# Altium PCB AnalExtend.PcbDoc (part 1 of 3)
Units mm, origin at the board's own origin, x right, y up, seen from the top; angles counter-clockwise.
Board outline 190 x 160 mm, 2 copper layers (Top Layer, Bottom Layer), stack 1.536 mm thick; 277 components, 158 nets, 942 pads, 254 vias.
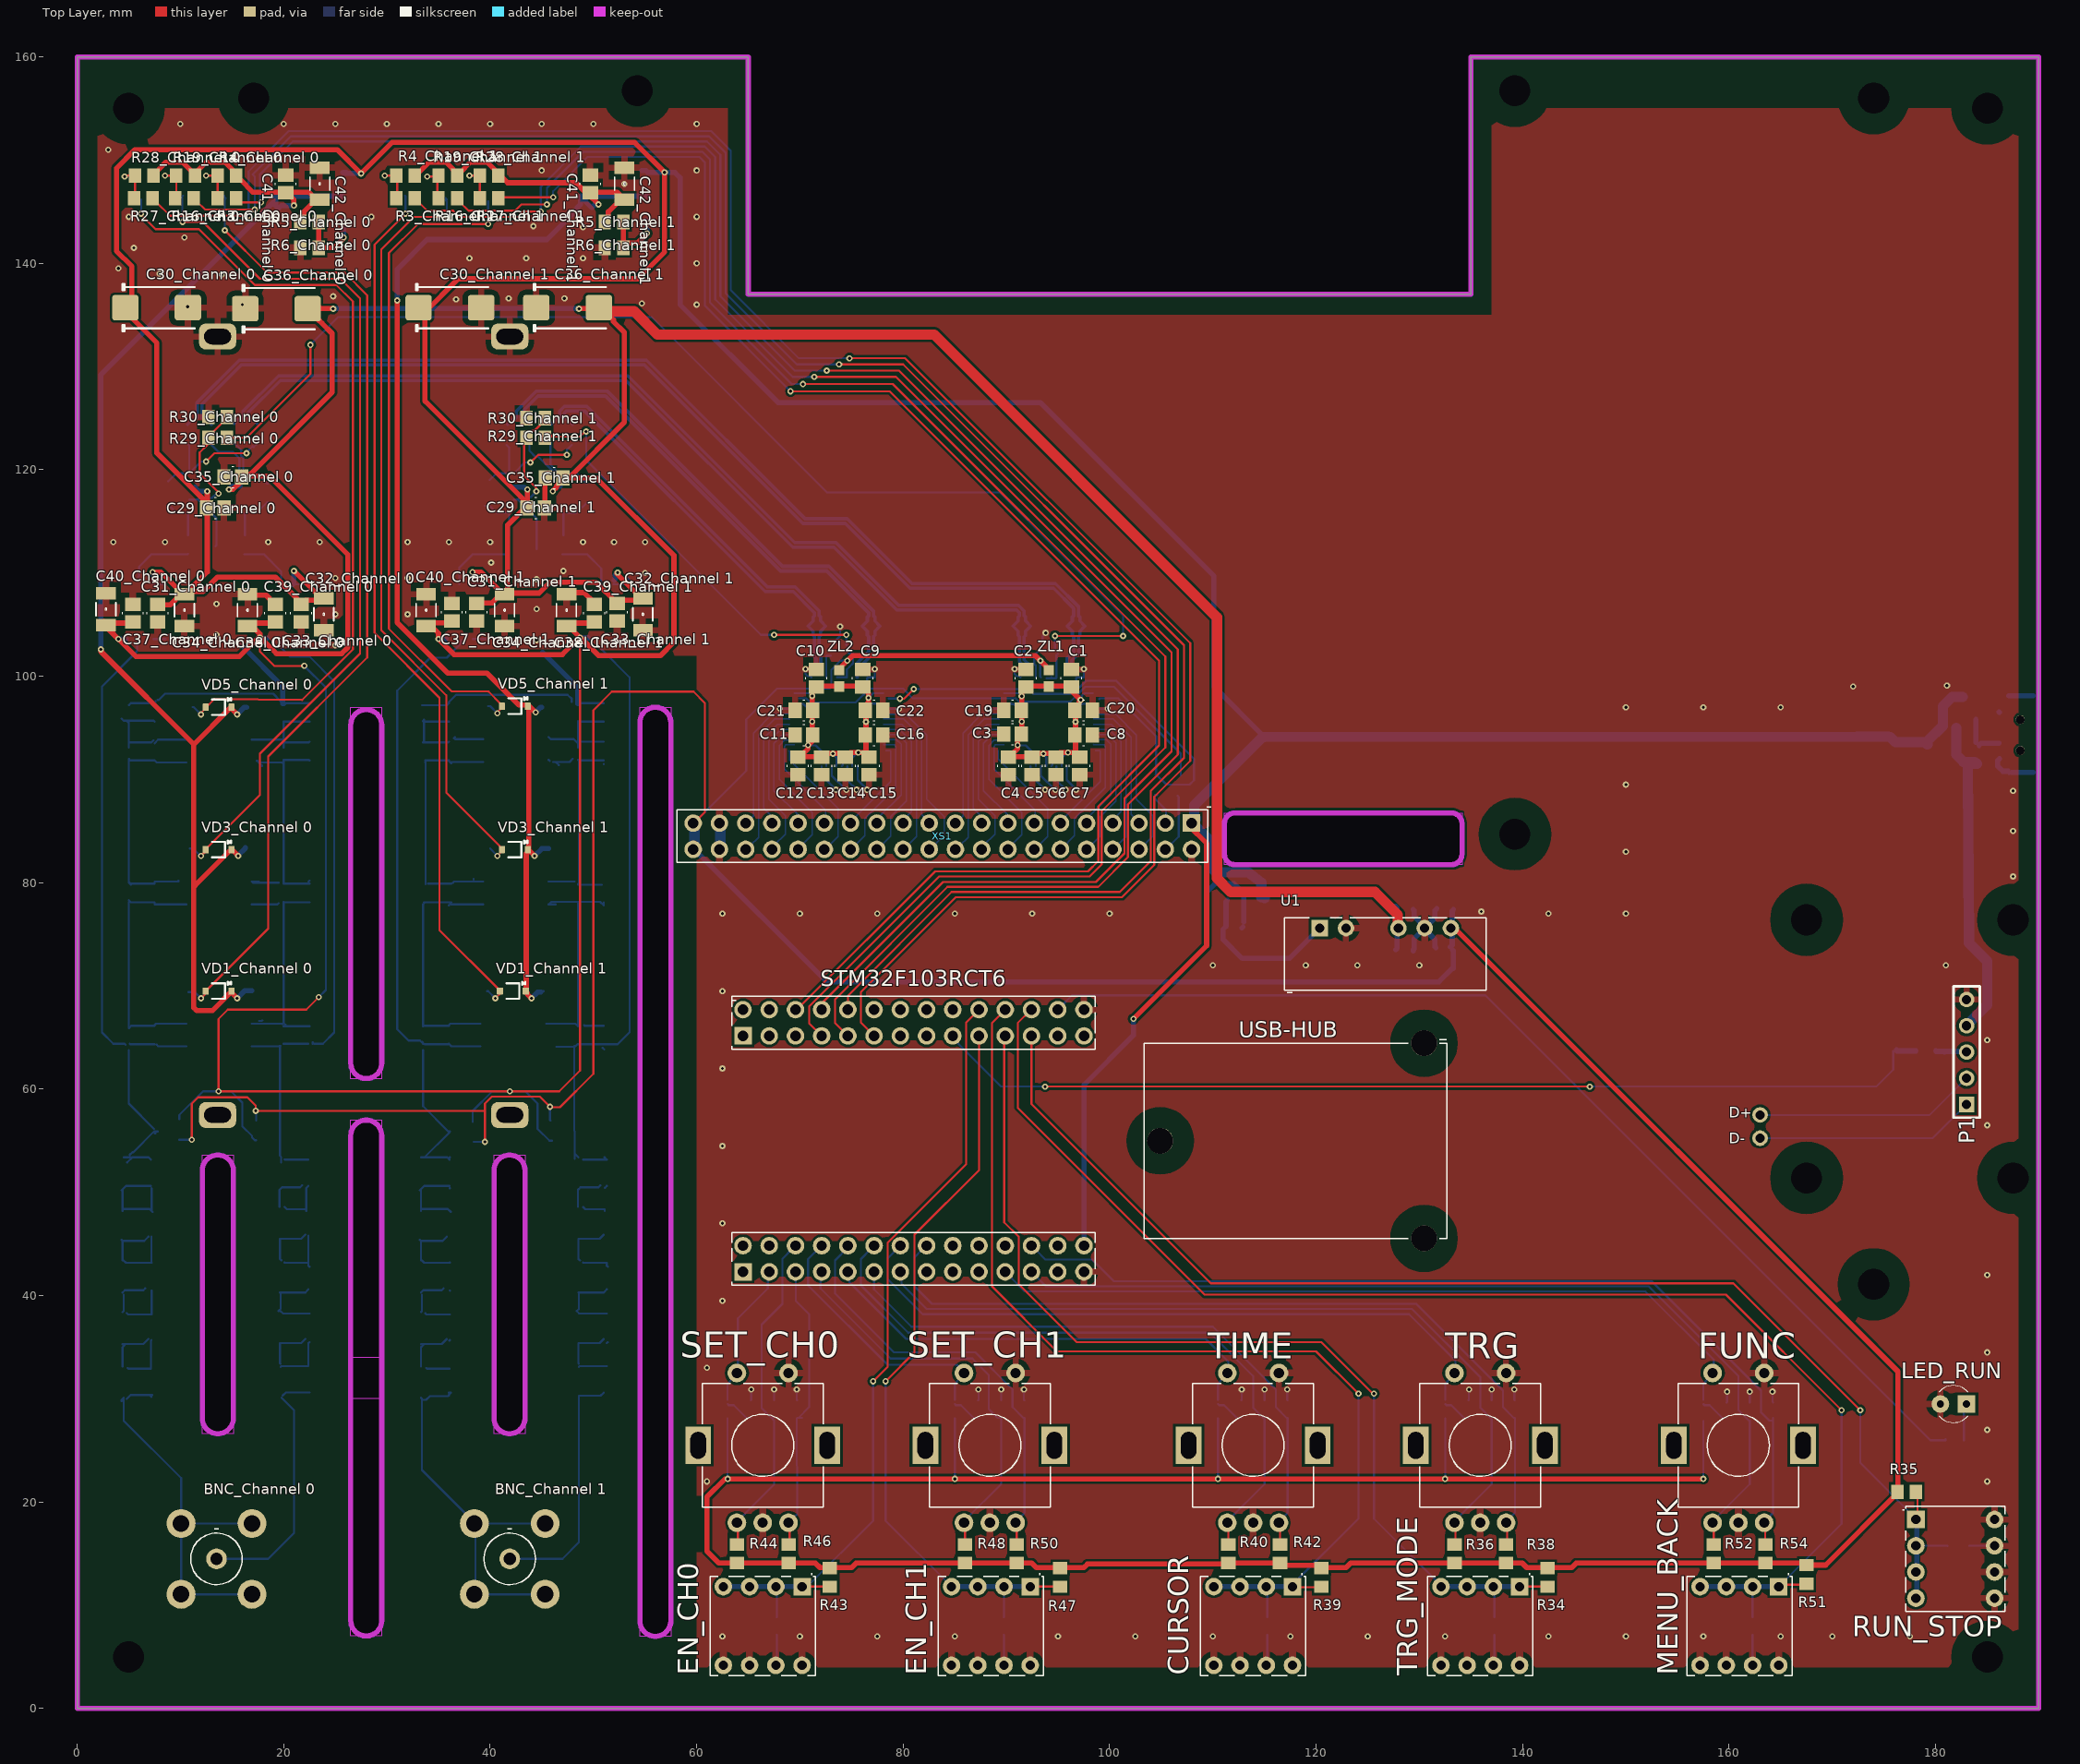
[diagram p0: Top Layer view]
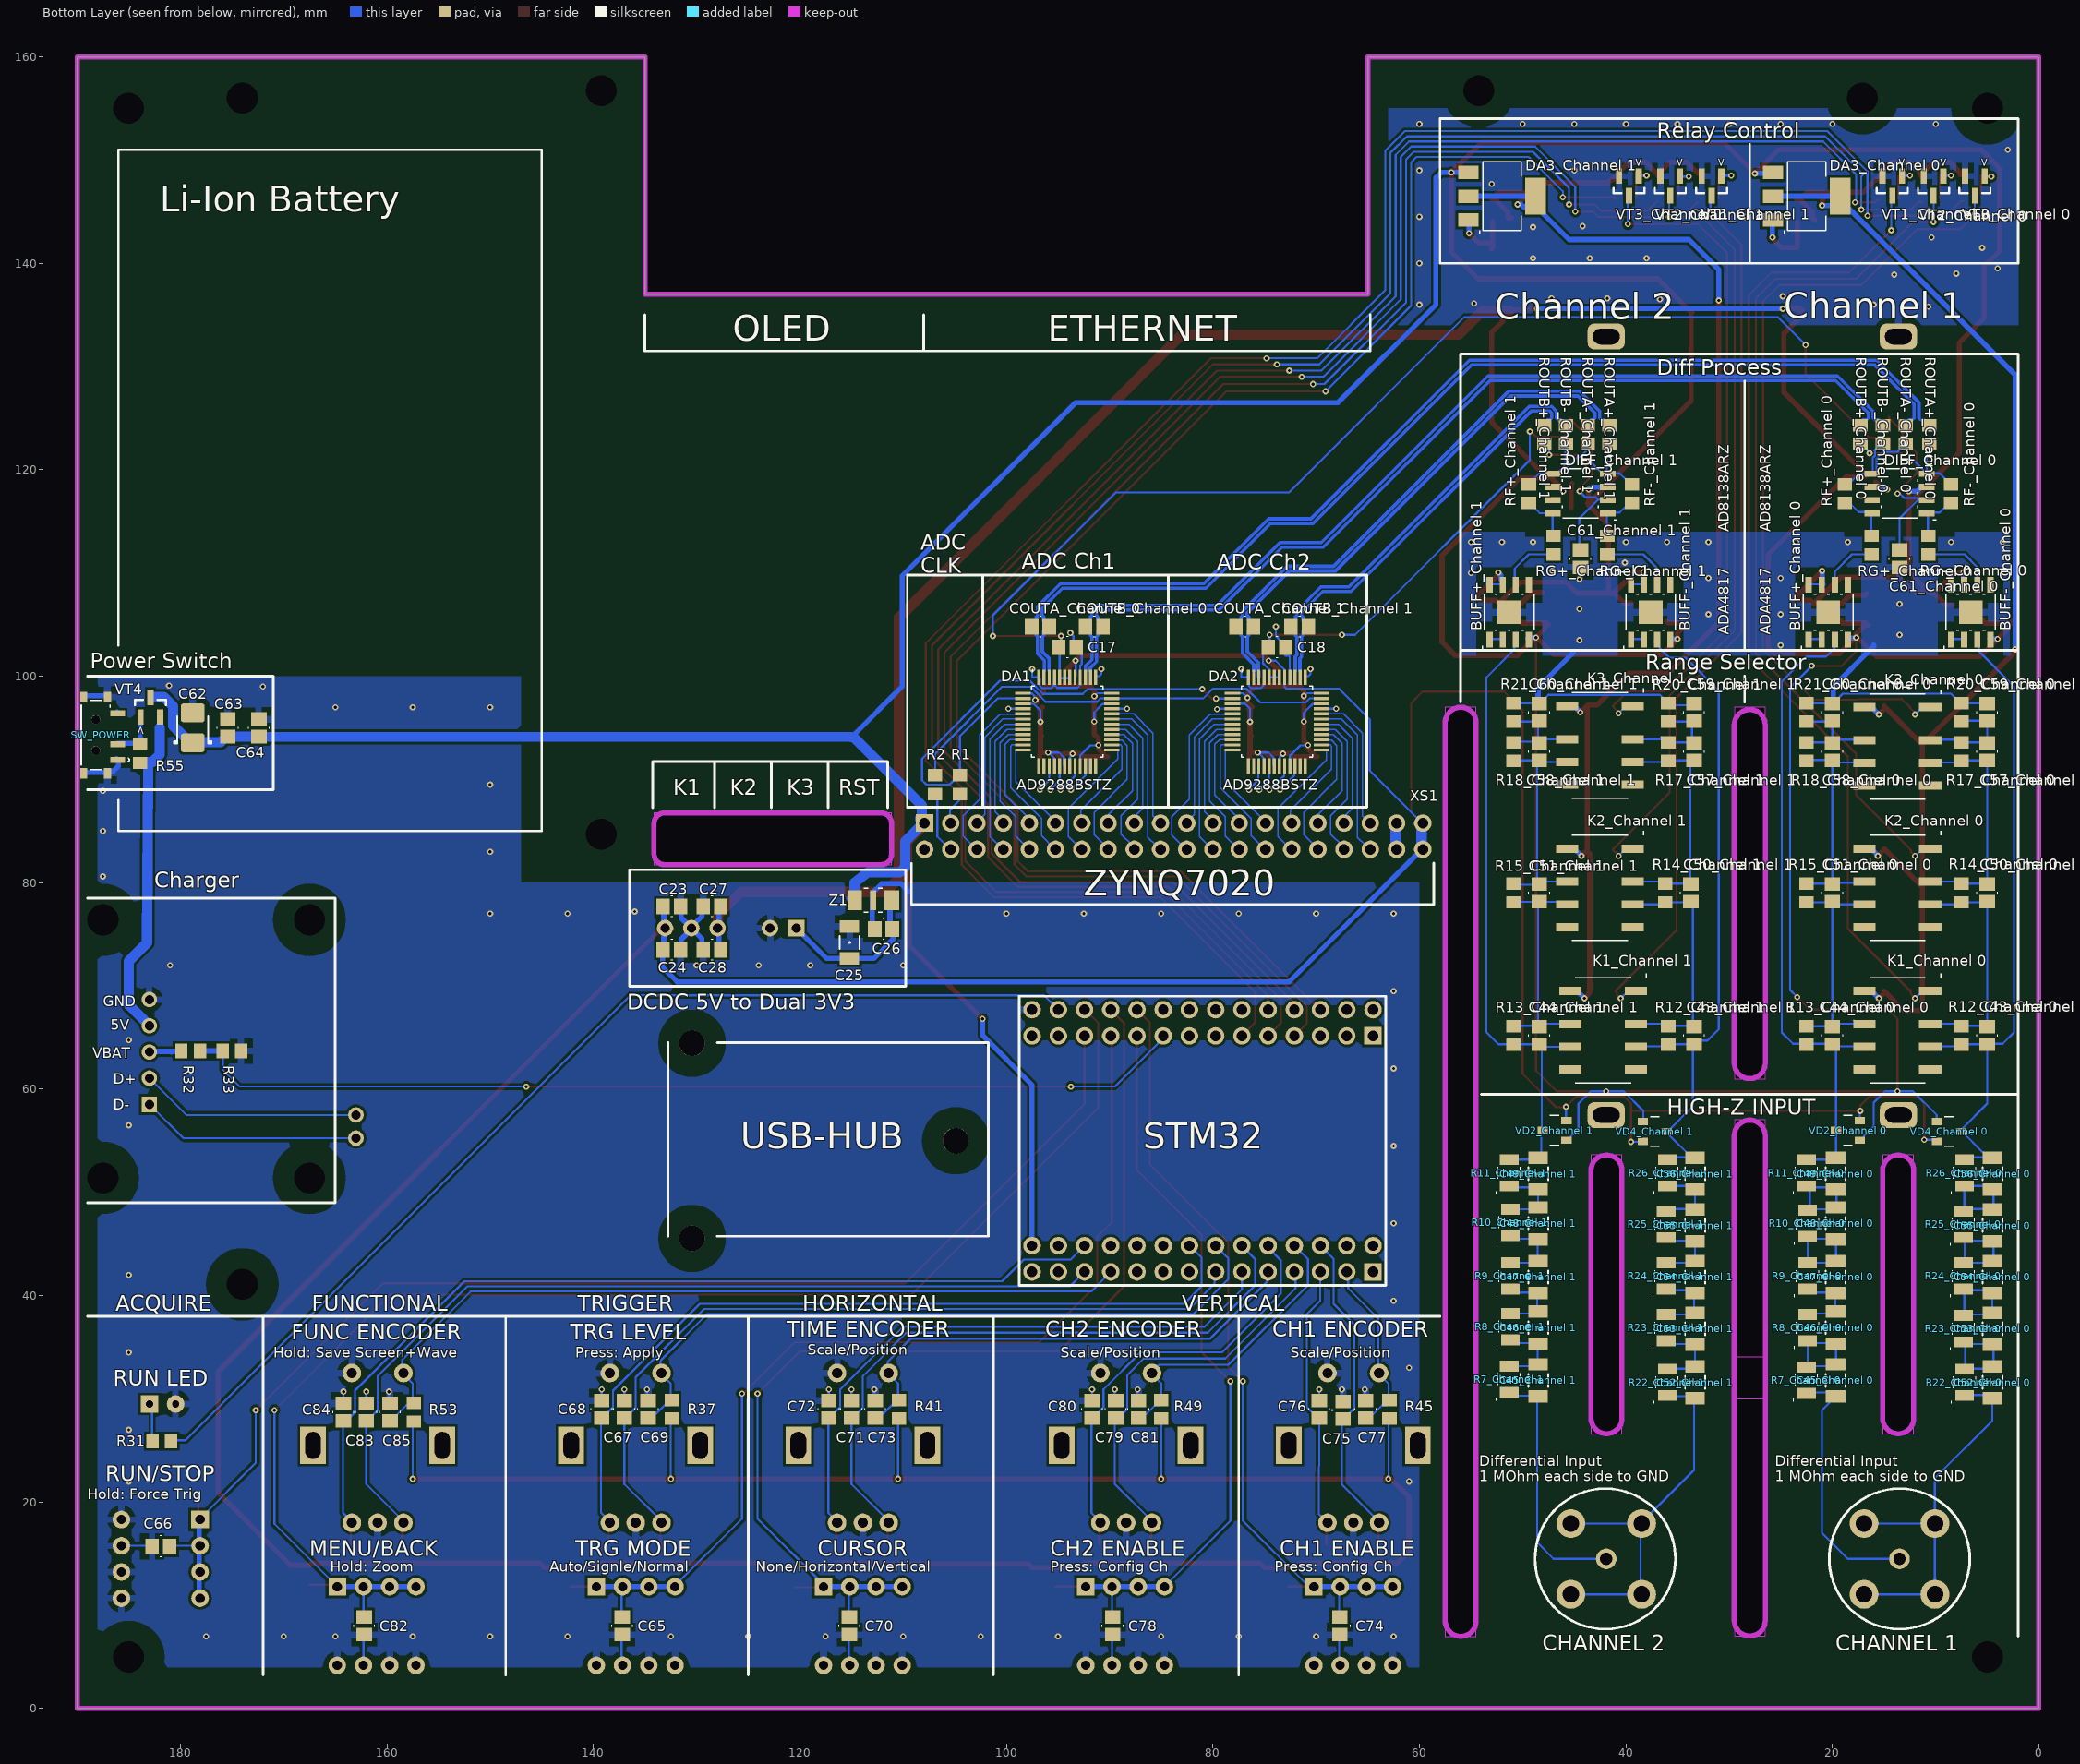
[diagram p1: Bottom Layer view, seen from below]
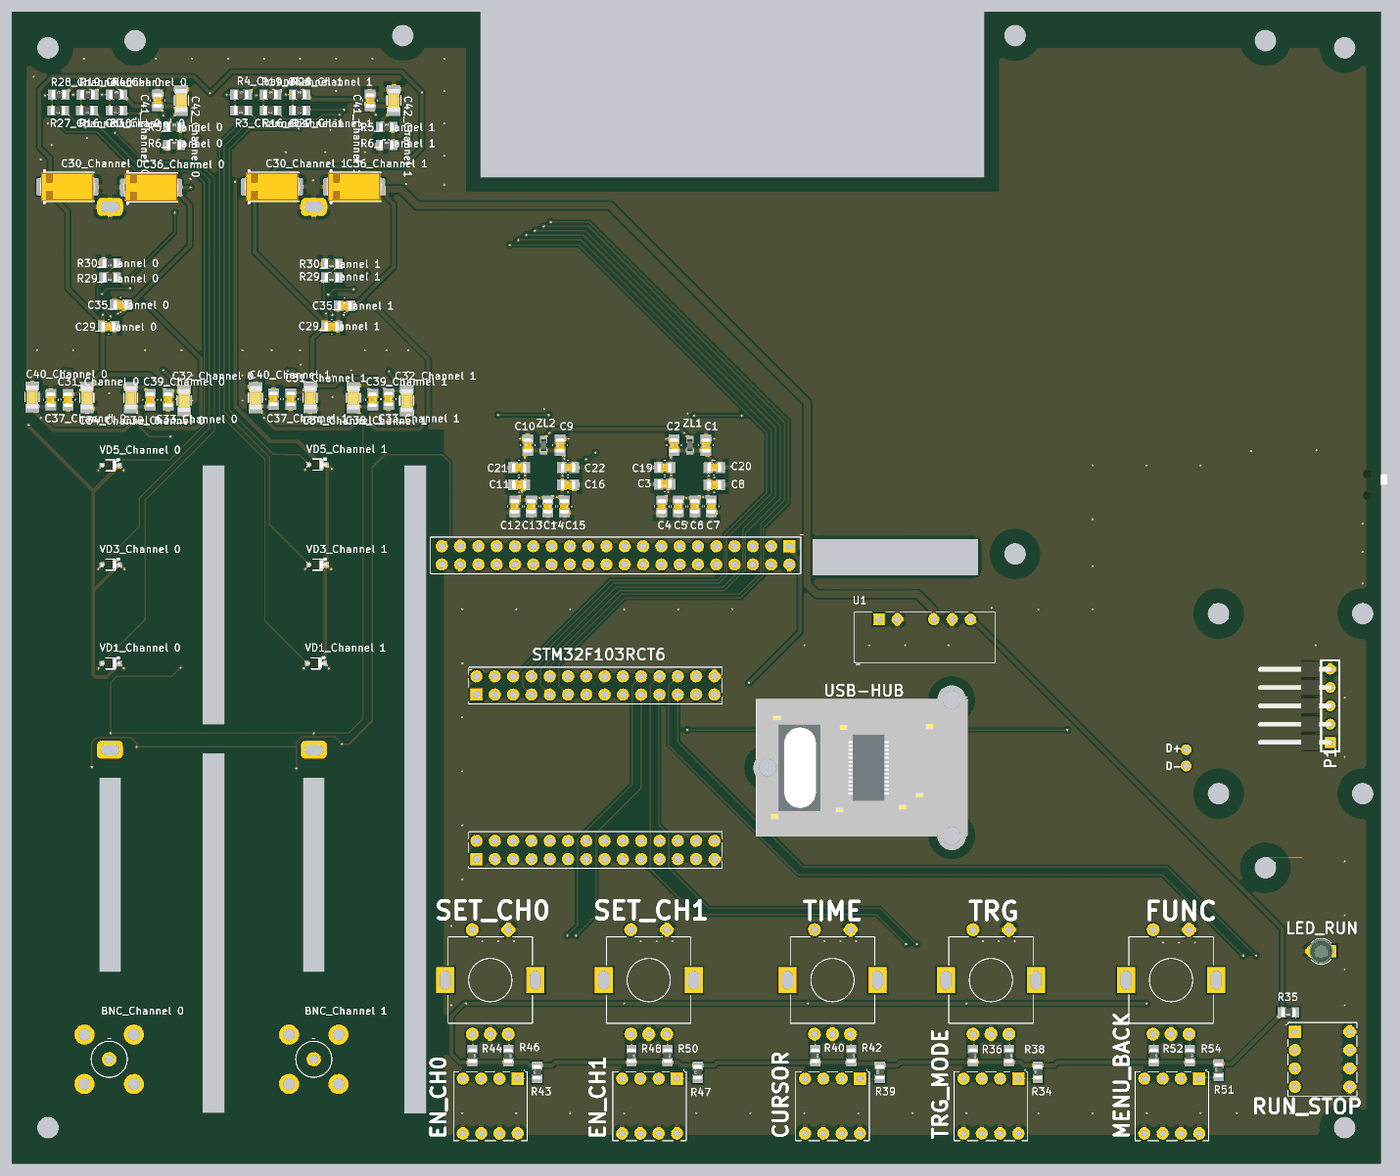
[diagram p4: 3D render of the assembled board from above, using the file's embedded part models]
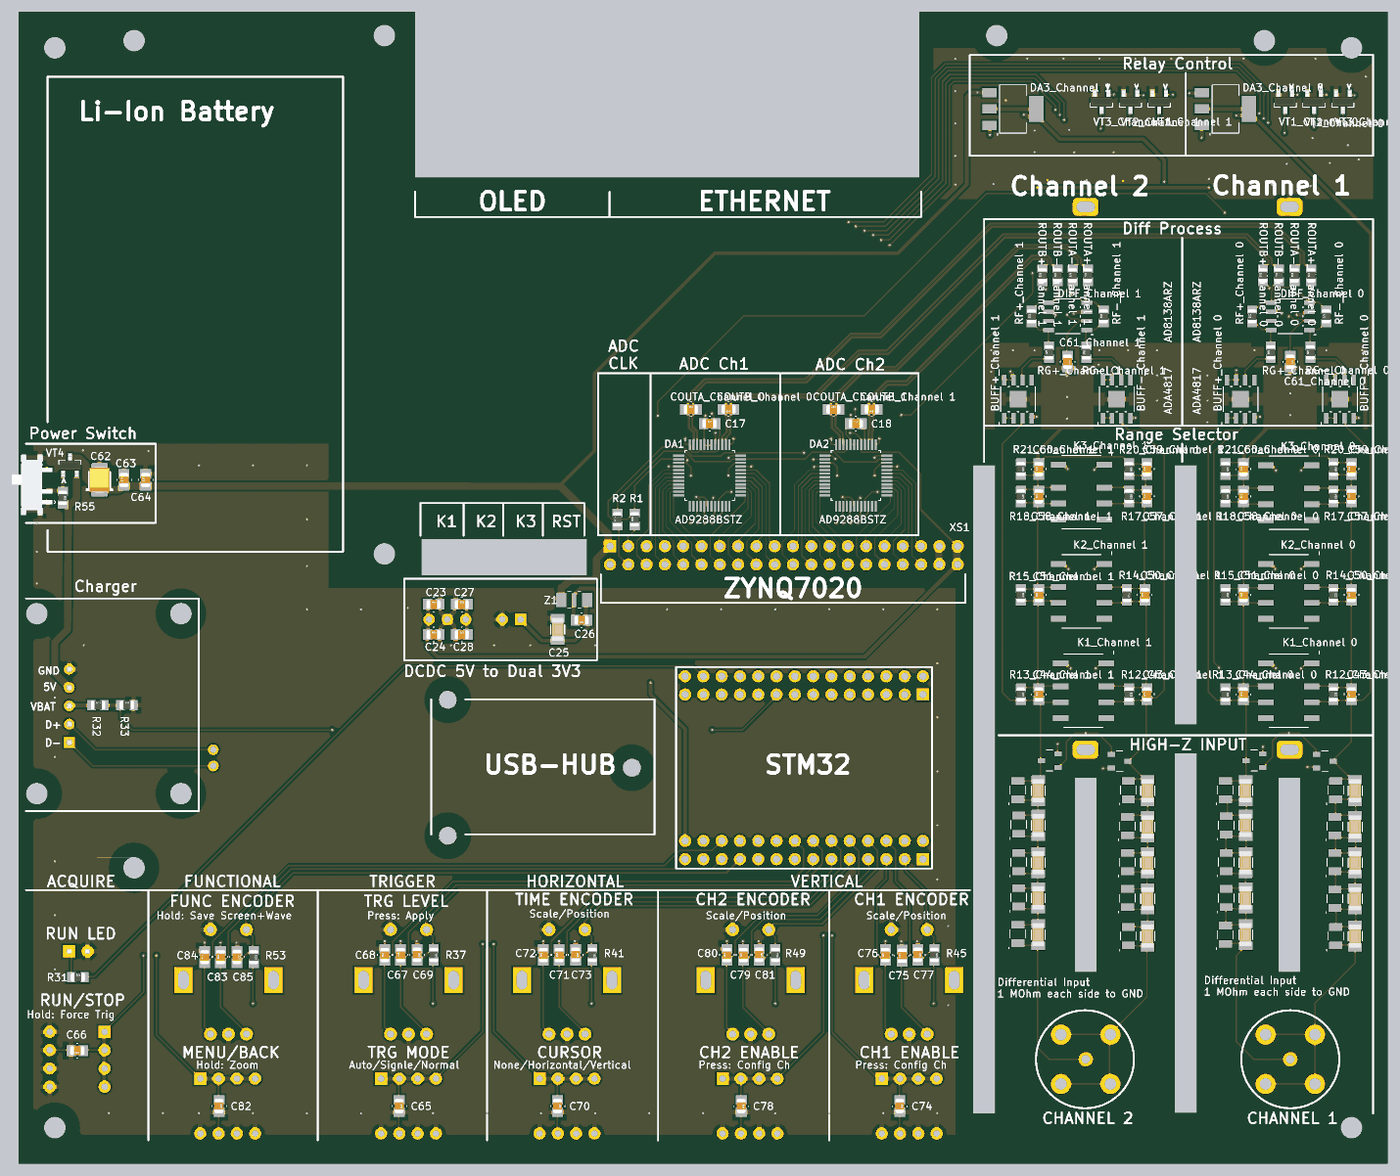
[diagram p5: 3D render of the assembled board from below, using the file's embedded part models]

## Layer stack, top to bottom
Top Solder: solder mask 0.01, Solder Resist, Dk 3.5
Top Layer: signal copper 0.018
Dielectric 1: dielectric 1.5, FR-4, Dk 4.8
Bottom Layer: signal copper 0.018
Bottom Solder: solder mask 0.01, Solder Resist, Dk 3.5

## Board outline
0,0 0,160 65,160 65,137 135,137 135,160 190,160 190,0
cut-out: 54.5,97 57.5,97 57.5,7 54.5,7
cut-out: 111.125,86.75 134.125,86.75 134.125,81.75 111.125,81.75
cut-out: 26.5,97 29.5,97 29.5,61 26.5,61
cut-out: 26.5,34.022 29.5,34.022 29.5,7.022 26.5,7.022
cut-out: 26.5,57 29.5,57 29.5,30 26.5,30
cut-out: 40.375,53.625 43.375,53.625 43.375,26.625 40.375,26.625
cut-out: 12.125,53.625 15.125,53.625 15.125,26.625 12.125,26.625

## Design rules (kind name [scope] priority, off if disabled: settings)
BoardOutlineClearance [All] p1: gap=0.2 ignorepadtopadclearanceinfootprint=FALSE
Clearance Pads [InPadClass('FreePads') vs All And Not IsKeepOut] p1: gap=2 ignorepadtopadclearanceinfootprint=FALSE
Clearance HighImpedance [InPadClass('HighImpedance') vs InPolygon] p2: gap=2 ignorepadtopadclearanceinfootprint=TRUE
Clearance AD4817 [InPadClass('AD4817') vs InPolygon] p3: gap=1 ignorepadtopadclearanceinfootprint=TRUE
Clearance Polygon [InPolygon] p4: gap=0.254 ignorepadtopadclearanceinfootprint=FALSE
Clearance [All And Not IsKeepOut vs All And Not IsKeepOut] p5: gap=0.127 ignorepadtopadclearanceinfootprint=FALSE
ComponentClearance PBD_Fix [InComponent('XS1')] p1: gap=-1000 collisioncheckmode=3 verticalgap=-1000 showdistances=FALSE
ComponentClearance [All] p2: gap=0.127 collisioncheckmode=3 verticalgap=0.127 showdistances=TRUE
DiffPairsRouting [All] p1: maxlimit=0.127 minlimit=0.127 mostfreqgap=0.127 substack1={52BC7A19-AC26-4FE2-AEB4-8A95F2219802} toplayer_{52bc7a19-ac26-4fe2-aeb4-8a95f2219802}_minwidth=0.219 toplayer_{52bc7a19-ac26-4fe2-aeb4-8a95f2219802}_maxwidth=0.324 toplayer_{52bc7a19-ac26-4fe2-aeb4-8a95f2219802}_prefwidth=0.324 bottomlayer_{52bc7a19-ac26-4fe2-aeb4-8a95f2219802}_minwidth=0.219 bottomlayer_{52bc7a19-ac26-4fe2-aeb4-8a95f2219802}_maxwidth=0.324 bottomlayer_{52bc7a19-ac26-4fe2-aeb4-8a95f2219802}_prefwidth=0.324 substack2={1CCD4305-8F2D-40CB-A839-7ECA1992B12F} toplayer_{1ccd4305-8f2d-40cb-a839-7eca1992b12f}_minwidth=0.219 toplayer_{1ccd4305-8f2d-40cb-a839-7eca1992b12f}_maxwidth=0.324 toplayer_{1ccd4305-8f2d-40cb-a839-7eca1992b12f}_prefwidth=0.324 bottomlayer_{1ccd4305-8f2d-40cb-a839-7eca1992b12f}_minwidth=0.219 bottomlayer_{1ccd4305-8f2d-40cb-a839-7eca1992b12f}_maxwidth=0.324 bottomlayer_{1ccd4305-8f2d-40cb-a839-7eca1992b12f}_prefwidth=0.324 substack3={3B3473B2-EE19-4039-8EDA-B0013C4A5760} toplayer_{3b3473b2-ee19-4039-8eda-b0013c4a5760}_minwidth=0.219 toplayer_{3b3473b2-ee19-4039-8eda-b0013c4a5760}_maxwidth=0.324 toplayer_{3b3473b2-ee19-4039-8eda-b0013c4a5760}_prefwidth=0.324 bottomlayer_{3b3473b2-ee19-4039-8eda-b0013c4a5760}_minwidth=0.219 bottomlayer_{3b3473b2-ee19-4039-8eda-b0013c4a5760}_maxwidth=0.324 bottomlayer_{3b3473b2-ee19-4039-8eda-b0013c4a5760}_prefwidth=0.324 substack4={816138ED-09EF-49B6-9FCF-DD0559817986} toplayer_{816138ed-09ef-49b6-9fcf-dd0559817986}_minwidth=0.219 toplayer_{816138ed-09ef-49b6-9fcf-dd0559817986}_maxwidth=0.324 toplayer_{816138ed-09ef-49b6-9fcf-dd0559817986}_prefwidth=0.324 bottomlayer_{816138ed-09ef-49b6-9fcf-dd0559817986}_minwidth=0.219 bottomlayer_{816138ed-09ef-49b6-9fcf-dd0559817986}_maxwidth=0.324 bottomlayer_{816138ed-09ef-49b6-9fcf-dd0559817986}_prefwidth=0.324 substack5={79B805EB-AF71-4574-947E-FCD21BC02437} toplayer_{79b805eb-af71-4574-947e-fcd21bc02437}_minwidth=0.219 toplayer_{79b805eb-af71-4574-947e-fcd21bc02437}_maxwidth=0.324 toplayer_{79b805eb-af71-4574-947e-fcd21bc02437}_prefwidth=0.324 bottomlayer_{79b805eb-af71-4574-947e-fcd21bc02437}_minwidth=0.219 bottomlayer_{79b805eb-af71-4574-947e-fcd21bc02437}_maxwidth=0.324 bottomlayer_{79b805eb-af71-4574-947e-fcd21bc02437}_prefwidth=0.324 toplayer_minwidth=0.219 toplayer_maxwidth=0.324 toplayer_prefwidth=0.324 bottomlayer_minwidth=0.219 bottomlayer_maxwidth=0.324 bottomlayer_prefwidth=0.324 substack6={94590665-1CE3-4E74-BD82-BF0555198367} toplayer_{94590665-1ce3-4e74-bd82-bf0555198367}_minwidth=0.219 toplayer_{94590665-1ce3-4e74-bd82-bf0555198367}_maxwidth=0.324 toplayer_{94590665-1ce3-4e74-bd82-bf0555198367}_prefwidth=0.324 bottomlayer_{94590665-1ce3-4e74-bd82-bf0555198367}_minwidth=0.219 bottomlayer_{94590665-1ce3-4e74-bd82-bf0555198367}_maxwidth=0.324 bottomlayer_{94590665-1ce3-4e74-bd82-bf0555198367}_prefwidth=0.324 substack7={572C7D55-D6A5-4D7A-B492-9D074733FB93} toplayer_{572c7d55-d6a5-4d7a-b492-9d074733fb93}_minwidth=0.219 toplayer_{572c7d55-d6a5-4d7a-b492-9d074733fb93}_maxwidth=0.324 toplayer_{572c7d55-d6a5-4d7a-b492-9d074733fb93}_prefwidth=0.324 bottomlayer_{572c7d55-d6a5-4d7a-b492-9d074733fb93}_minwidth=0.219 bottomlayer_{572c7d55-d6a5-4d7a-b492-9d074733fb93}_maxwidth=0.324 bottomlayer_{572c7d55-d6a5-4d7a-b492-9d074733fb93}_prefwidth=0.324 substack8={F126E161-8C9C-4616-A3DE-242707D52D63} toplayer_{f126e161-8c9c-4616-a3de-242707d52d63}_minwidth=0.219 toplayer_{f126e161-8c9c-4616-a3de-242707d52d63}_maxwidth=0.324 toplayer_{f126e161-8c9c-4616-a3de-242707d52d63}_prefwidth=0.324 bottomlayer_{f126e161-8c9c-4616-a3de-242707d52d63}_minwidth=0.219 bottomlayer_{f126e161-8c9c-4616-a3de-242707d52d63}_maxwidth=0.324 bottomlayer_{f126e161-8c9c-4616-a3de-242707d52d63}_prefwidth=0.324 substack9={F978F6FE-6824-4375-B3A7-138047E2550F} toplayer_{f978f6fe-6824-4375-b3a7-138047e2550f}_minwidth=0.219 toplayer_{f978f6fe-6824-4375-b3a7-138047e2550f}_maxwidth=0.324 toplayer_{f978f6fe-6824-4375-b3a7-138047e2550f}_prefwidth=0.324 bottomlayer_{f978f6fe-6824-4375-b3a7-138047e2550f}_minwidth=0.219 bottomlayer_{f978f6fe-6824-4375-b3a7-138047e2550f}_maxwidth=0.324 bottomlayer_{f978f6fe-6824-4375-b3a7-138047e2550f}_prefwidth=0.324 impedanceprofiledriven=TRUE impedanceprofileid={002C0A61-6B91-43CF-82E2-5BB938C64613} impedanceprofilevalue=100.000000 maxuncoupledlength=12.7
Height [All] p1: minheight=0 maxheight=1816.048 prefheight=12.7
HoleSize [All] p1: absolutevalues=TRUE maxlimit=1000 minlimit=0.2 maxpercent=80.000 minpercent=20.000
HoleToHoleClearance [All] p1: gap=0.25 allowstackedmicrovias=FALSE
MinimumAnnularRing [All] p1: minimumring=0.15
MinimumSolderMaskSliver [All] p1: minsoldermaskwidth=0.15
PlaneClearance [All] p1: clearance=0.5
PlaneConnect PlaneConnectPowerPads [InPadClass('PowerPads')] p1: planeconnectstyle=Direct reliefexpansion=0.508 reliefentries=4 reliefconductorwidth=0.254 reliefairgap=0.254
PlaneConnect [All] p2: pad.planeconnectstyle=Relief pad.reliefexpansion=0.3 pad.reliefentries=4 pad.reliefconductorwidth=0.127 pad.reliefairgap=0.127 via.planeconnectstyle=Direct via.reliefexpansion=0.3 via.reliefentries=4 via.reliefconductorwidth=0.127 via.reliefairgap=0.127
PolygonConnect GND2GND [IsVia And InNet('GND')] p1: connectstyle=Direct reliefconductorwidth=0.254 reliefentries=4 polygonreliefangle="90 Angle" airgapwidth=0.254
PolygonConnect PolygonConnectPowerPads [All vs (InPadClass('PowerPads'))] p2: connectstyle=Direct reliefconductorwidth=0.254 reliefentries=4 polygonreliefangle="90 Angle" airgapwidth=0.254
PolygonConnect [All] p3: connectstyle=Relief reliefconductorwidth=0.635 reliefentries=4 polygonreliefangle="90 Angle" airgapwidth=0.508
RoutingVias [All] p1: holewidth=0.4 width=0.8 viastyle="Through Hole" minholewidth=0.3 minwidth=0.6 maxholewidth=0.35 maxwidth=0.7
SilkToSilkClearance [All] p1: silktosilkclearance=0
SilkToSolderMaskClearance [IsPad] p1: minsilkscreentomaskgap=0.127 clearancetoexposedcopper=TRUE
SolderMaskExpansion [All] p1: expansion=0.075
Width [All] p1: maxlimit=1 minlimit=0.127 preferedwidth=0.2
20 further rules are at their usual default settings.

## Classes and differential pairs
channel class DiffMeasure: "Channel 0" "Channel 1"
component class "Channel 1": "BNC_Channel 1" "BUFF+_Channel 1" "BUFF-_Channel 1" "C29_Channel 1" "C30_Channel 1" "C31_Channel 1" "C32_Channel 1" "C33_Channel 1" "C34_Channel 1" "C35_Channel 1" "C36_Channel 1" "C37_Channel 1" "C38_Channel 1" "C39_Channel 1" "C40_Channel 1" "C41_Channel 1" "C42_Channel 1" "C43_Channel 1" "C44_Channel 1" "C45_Channel 1" "C46_Channel 1" "C47_Channel 1" "C48_Channel 1" "C49_Channel 1" "C50_Channel 1" "C51_Channel 1" "C52_Channel 1" "C53_Channel 1" "C54_Channel 1" "C55_Channel 1" "C56_Channel 1" "C57_Channel 1" "C58_Channel 1" "C59_Channel 1" "C60_Channel 1" "C61_Channel 1" "COUTA_Channel 1" "COUTB_Channel 1" "DA3_Channel 1" "DIFF_Channel 1" "K1_Channel 1" "K2_Channel 1" "K3_Channel 1" "R3_Channel 1" "R4_Channel 1" "R5_Channel 1" "R6_Channel 1" "R7_Channel 1" "R8_Channel 1" "R9_Channel 1" "R10_Channel 1" "R11_Channel 1" "R12_Channel 1" "R13_Channel 1" "R14_Channel 1" "R15_Channel 1" "R16_Channel 1" "R17_Channel 1" "R18_Channel 1" "R19_Channel 1" "R20_Channel 1" "R21_Channel 1" "R22_Channel 1" "R23_Channel 1" "R24_Channel 1" "R25_Channel 1" "R26_Channel 1" "R27_Channel 1" "R28_Channel 1" "R29_Channel 1" "R30_Channel 1" "RF+_Channel 1" "RF-_Channel 1" "RG+_Channel 1" "RG-_Channel 1" "ROUTA+_Channel 1" "ROUTA-_Channel 1" "ROUTB+_Channel 1" "ROUTB-_Channel 1" "VD1_Channel 1" "VD2_Channel 1" "VD3_Channel 1" "VD4_Channel 1" "VD5_Channel 1" "VT1_Channel 1" "VT2_Channel 1" "VT3_Channel 1"
component class "Channel 0": "BNC_Channel 0" "BUFF+_Channel 0" "BUFF-_Channel 0" "C29_Channel 0" "C30_Channel 0" "C31_Channel 0" "C32_Channel 0" "C33_Channel 0" "C34_Channel 0" "C35_Channel 0" "C36_Channel 0" "C37_Channel 0" "C38_Channel 0" "C39_Channel 0" "C40_Channel 0" "C41_Channel 0" "C42_Channel 0" "C43_Channel 0" "C44_Channel 0" "C45_Channel 0" "C46_Channel 0" "C47_Channel 0" "C48_Channel 0" "C49_Channel 0" "C50_Channel 0" "C51_Channel 0" "C52_Channel 0" "C53_Channel 0" "C54_Channel 0" "C55_Channel 0" "C56_Channel 0" "C57_Channel 0" "C58_Channel 0" "C59_Channel 0" "C60_Channel 0" "C61_Channel 0" "COUTA_Channel 0" "COUTB_Channel 0" "DA3_Channel 0" "DIFF_Channel 0" "K1_Channel 0" "K2_Channel 0" "K3_Channel 0" "R3_Channel 0" "R4_Channel 0" "R5_Channel 0" "R6_Channel 0" "R7_Channel 0" "R8_Channel 0" "R9_Channel 0" "R10_Channel 0" "R11_Channel 0" "R12_Channel 0" "R13_Channel 0" "R14_Channel 0" "R15_Channel 0" "R16_Channel 0" "R17_Channel 0" "R18_Channel 0" "R19_Channel 0" "R20_Channel 0" "R21_Channel 0" "R22_Channel 0" "R23_Channel 0" "R24_Channel 0" "R25_Channel 0" "R26_Channel 0" "R27_Channel 0" "R28_Channel 0" "R29_Channel 0" "R30_Channel 0" "RF+_Channel 0" "RF-_Channel 0" "RG+_Channel 0" "RG-_Channel 0" "ROUTA+_Channel 0" "ROUTA-_Channel 0" "ROUTB+_Channel 0" "ROUTB-_Channel 0" "VD1_Channel 0" "VD2_Channel 0" "VD3_Channel 0" "VD4_Channel 0" "VD5_Channel 0" "VT1_Channel 0" "VT2_Channel 0" "VT3_Channel 0"
component class Interfaces: C65 C66 C67 C68 C69 C70 C71 C72 C73 C74 C75 C76 C77 C78 C79 C80 C81 C82 C83 C84 C85 CURSOR EN_CH0 EN_CH1 FUNC LED_RUN MENU_BACK R31 R34 R35 R36 R37 R38 R39 R40 R41 R42 R43 R44 R45 R46 R47 R48 R49 R50 R51 R52 R53 R54 RUN_STOP SET_CH0 SET_CH1 STM32F103RCT6 TIME TRG TRG_MODE
pad class FreePads: Free-3 USB-HUB-
pad class AD4817: "BUFF+_Channel 0-1" "BUFF+_Channel 0-2" "BUFF+_Channel 0-3" "BUFF+_Channel 0-4" "BUFF+_Channel 0-5" "BUFF+_Channel 0-6" "BUFF+_Channel 0-7" "BUFF+_Channel 0-8" "BUFF+_Channel 0-9" "BUFF+_Channel 1-1" "BUFF+_Channel 1-2" "BUFF+_Channel 1-3" "BUFF+_Channel 1-4" "BUFF+_Channel 1-5" "BUFF+_Channel 1-6" "BUFF+_Channel 1-7" "BUFF+_Channel 1-8" "BUFF+_Channel 1-9" "BUFF-_Channel 0-1" "BUFF-_Channel 0-2" "BUFF-_Channel 0-3" "BUFF-_Channel 0-4" "BUFF-_Channel 0-5" "BUFF-_Channel 0-6" "BUFF-_Channel 0-7" "BUFF-_Channel 0-8" "BUFF-_Channel 0-9" "BUFF-_Channel 1-1" "BUFF-_Channel 1-2" "BUFF-_Channel 1-3" "BUFF-_Channel 1-4" "BUFF-_Channel 1-5" "BUFF-_Channel 1-6" "BUFF-_Channel 1-7" "BUFF-_Channel 1-8" "BUFF-_Channel 1-9"
pad class HighImpedance: "DIFF_Channel 0-1" "DIFF_Channel 0-8" "DIFF_Channel 1-1" "DIFF_Channel 1-8"
component class AnalExtend: C1 C2 C3 C4 C5 C6 C7 C8 C9 C10 C11 C12 C13 C14 C15 C16 C17 C18 C19 C20 C21 C22 C23 C24 C25 C26 C27 C28 C62 C63 C64 DA1 DA2 P1 "Power Switch" R1 R2 R32 R33 R55 SW_POWER U1 USB-HUB VT4 XS1 Z1 ZL1 ZL2
differential pair Ch1B: +Ch1B_OUT+ -Ch1B_OUT-
differential pair Ch1A: +Ch1A_OUT+ -Ch1A_OUT-
differential pair Ch0B: +Ch0B_OUT+ -Ch0B_OUT-
differential pair Ch0A: +Ch0A_OUT+ -Ch0A_OUT-

## Components (designator, comment, footprint, x,y, rotation, side; value= is the part's Value field where it differs from the comment)
"BNC_Channel 0" "BNC_THT" BNC_VERTICAL_THT_5PIN 13.5,14.5 r0 top (schematic designator BNC)
"BNC_Channel 1" "BNC_THT" BNC_VERTICAL_THT_5PIN 41.9,14.5 r0 top (schematic designator BNC)
"BUFF+_Channel 0" "ADA4817-1ARDZ" ADA4817-1ARDZ_SOIC8_EP 20.4,106.2 r90 bottom (schematic designator BUFF+)
"BUFF+_Channel 1" "ADA4817-1ARDZ" ADA4817-1ARDZ_SOIC8_EP 51.3,106.2 r90 bottom (schematic designator BUFF+)
"BUFF-_Channel 0" "ADA4817-1ARDZ" ADA4817-1ARDZ_SOIC8_EP 6.6,106.2 r90 bottom (schematic designator BUFF-)
"BUFF-_Channel 1" "ADA4817-1ARDZ" ADA4817-1ARDZ_SOIC8_EP 37.6,106.2 r90 bottom (schematic designator BUFF-)
C1 "=Description" CAPC2012(0805)N 96.3,99.8 r90 top value=0.1u
C2 "=Description" CAPC2012(0805)N 91.9,99.8 r90 top value=0.1u
C3 "=Description" CAPC2012(0805)N 90.6,94.4 r180 top value=0.1u
C4 "=Description" CAPC2012(0805)N 90.2,91.3 r270 top value=0.1u
C5 "=Description" CAPC2012(0805)N 92.5,91.3 r270 top value=0.1u
C6 "=Description" CAPC2012(0805)N 94.8,91.3 r270 top value=0.1u
C7 "=Description" CAPC2012(0805)N 97.1,91.3 r270 top value=0.1u
C8 "=Description" CAPC2012(0805)N 97.5,94.3 r0 top value=0.1u
C9 "=Description" CAPC2012(0805)N 76.1,99.8 r90 top value=0.1u
C10 "=Description" CAPC2012(0805)N 71.6,99.8 r90 top value=0.1u
C11 "=Description" CAPC2012(0805)N 70.4,94.3 r180 top value=0.1u
C12 "=Description" CAPC2012(0805)N 69.8,91.3 r270 top value=0.1u
C13 "=Description" CAPC2012(0805)N 72.1,91.3 r270 top value=0.1u
C14 "=Description" CAPC2012(0805)N 74.4,91.3 r270 top value=0.1u
C15 "=Description" CAPC2012(0805)N 76.7,91.3 r270 top value=0.1u
C16 "=Description" CAPC2012(0805)N 77.2,94.3 r0 top value=0.1u
C17 "=Description" CAPC2012(0805)N 94.1,102.8 r180 bottom value=0.1u
C18 "=Description" CAPC2012(0805)N 73.8,102.8 r180 bottom value=0.1u
C19 "=Description" CAPC2012(0805)N 90.6,96.7 r0 top value=1u
C20 "=Description" CAPC2012(0805)N 97.5,96.7 r180 top value=1u
C21 "=Description" CAPC2012(0805)N 70.4,96.7 r0 top value=1u
C22 "=Description" CAPC2012(0805)N 77.2,96.7 r180 top value=1u
C23 "=Description" CAPC2012(0805)N 132.4,77.7 r180 bottom value=0.1u
C24 "=Description" CAPC2012(0805)N 132.4,73.5 r180 bottom value=4.7u
C25 "2700p 50V" CAP_CER_1206 115.2,74.2 r90 bottom value=10u
C26 "=Description" CAPC2012(0805)N 111.9,75.5 r0 bottom value=0.1u
C27 "=Description" CAPC2012(0805)N 128.5,77.7 r180 bottom value=0.1
C28 "=Description" CAPC2012(0805)N 128.5,73.5 r180 bottom value=4.7u
"C29_Channel 0" "" CAPC2012(0805)N 13.4,116.3 r0 top value=0.1u (schematic designator C29)
"C29_Channel 1" "" CAPC2012(0805)N 44.4,116.3 r0 top value=0.1u (schematic designator C29)
"C30_Channel 0" "10u" CAPMP7343X310N 7.7,135.7 r0 top (schematic designator C30)
"C30_Channel 1" "10u" CAPMP7343X310N 36.1,135.7 r0 top (schematic designator C30)
"C31_Channel 0" "" CAPC2012(0805)N 7.8,106.1 r270 top value=0.1u (schematic designator C31)
"C31_Channel 1" "" CAPC2012(0805)N 38.7,106.2 r270 top value=0.1u (schematic designator C31)
"C32_Channel 0" "2700p 50V" CAP_CER_1206 23.9,106 r270 top value=10u (schematic designator C32)
"C32_Channel 1" "2700p 50V" CAP_CER_1206 54.8,106 r270 top value=10u (schematic designator C32)
"C33_Channel 0" "" CAPC2012(0805)N 21.7,106.1 r270 top value=0.1u (schematic designator C33)
"C33_Channel 1" "" CAPC2012(0805)N 52.3,106.2 r270 top value=0.1u (schematic designator C33)
"C34_Channel 0" "2700p 50V" CAP_CER_1206 10.4,106.4 r270 top value=10u (schematic designator C34)
"C34_Channel 1" "2700p 50V" CAP_CER_1206 41.4,106.4 r270 top value=10u (schematic designator C34)
"C35_Channel 0" "" CAPC2012(0805)N 15.1,119.3 r0 top value=0.1u (schematic designator C35)
"C35_Channel 1" "" CAPC2012(0805)N 46.2,119.2 r0 top value=0.1u (schematic designator C35)
"C36_Channel 0" "10u" CAPMP7343X310N 19.3,135.6 r0 top (schematic designator C36)
"C36_Channel 1" "10u" CAPMP7343X310N 47.5,135.7 r0 top (schematic designator C36)
"C37_Channel 0" "" CAPC2012(0805)N 5.4,106.1 r270 top value=0.1u (schematic designator C37)
"C37_Channel 1" "" CAPC2012(0805)N 36.3,106.2 r270 top value=0.1u (schematic designator C37)
"C38_Channel 0" "2700p 50V" CAP_CER_1206 16.5,106.4 r270 top value=10u (schematic designator C38)
"C38_Channel 1" "2700p 50V" CAP_CER_1206 47.4,106.4 r270 top value=10u (schematic designator C38)
"C39_Channel 0" "" CAPC2012(0805)N 19.2,106.1 r270 top value=0.1u (schematic designator C39)
"C39_Channel 1" "" CAPC2012(0805)N 50.1,106.1 r270 top value=0.1u (schematic designator C39)
"C40_Channel 0" "2700p 50V" CAP_CER_1206 2.8,106.5 r270 top value=10u (schematic designator C40)
"C40_Channel 1" "2700p 50V" CAP_CER_1206 33.8,106.4 r270 top value=10u (schematic designator C40)
"C41_Channel 0" "" CAPC2012(0805)N 20.2,147.7 r90 top value=0.1u (schematic designator C41)
"C41_Channel 1" "" CAPC2012(0805)N 49.7,147.7 r90 top value=0.1u (schematic designator C41)
"C42_Channel 0" "2700p 50V" CAP_CER_1206 23.5,147.7 r90 top value=10u (schematic designator C42)
"C42_Channel 1" "2700p 50V" CAP_CER_1206 53,147.7 r90 top value=10u (schematic designator C42)
"C43_Channel 0" "" CAPC2012(0805)N 5,65.2 r90 bottom value=5.7p (schematic designator C43)
"C43_Channel 1" "" CAPC2012(0805)N 33.4,65.2 r90 bottom value=5.7p (schematic designator C43)
"C44_Channel 0" "" CAPC2012(0805)N 20,65.2 r90 bottom value=5.7p (schematic designator C44)
"C44_Channel 1" "" CAPC2012(0805)N 48.4,65.2 r90 bottom value=5.7p (schematic designator C44)
"C45_Channel 0" "2700p 50V" CAP_CER_1206 19.7,31.8 r90 bottom value=27p (schematic designator C45)
"C45_Channel 1" "2700p 50V" CAP_CER_1206 48.5,31.8 r90 bottom value=27p (schematic designator C45)
"C46_Channel 0" "2700p 50V" CAP_CER_1206 19.7,36.9 r90 bottom value=27p (schematic designator C46)
"C46_Channel 1" "2700p 50V" CAP_CER_1206 48.5,36.9 r90 bottom value=27p (schematic designator C46)
"C47_Channel 0" "2700p 50V" CAP_CER_1206 19.7,41.8 r90 bottom value=27p (schematic designator C47)
"C47_Channel 1" "2700p 50V" CAP_CER_1206 48.5,41.8 r90 bottom value=27p (schematic designator C47)
"C48_Channel 0" "2700p 50V" CAP_CER_1206 19.7,47 r90 bottom value=27p (schematic designator C48)
"C48_Channel 1" "2700p 50V" CAP_CER_1206 48.5,47 r90 bottom value=27p (schematic designator C48)
"C49_Channel 0" "2700p 50V" CAP_CER_1206 19.7,51.8 r90 bottom value=27p (schematic designator C49)
"C49_Channel 1" "2700p 50V" CAP_CER_1206 48.5,51.8 r90 bottom value=27p (schematic designator C49)
"C50_Channel 0" "" CAPC2012(0805)N 5,79 r90 bottom value=115p (schematic designator C50)
"C50_Channel 1" "" CAPC2012(0805)N 33.7,79 r90 bottom value=115p (schematic designator C50)
"C51_Channel 0" "" CAPC2012(0805)N 20,79 r90 bottom value=115p (schematic designator C51)
"C51_Channel 1" "" CAPC2012(0805)N 48.4,79 r90 bottom value=115p (schematic designator C51)
"C52_Channel 0" "2700p 50V" CAP_CER_1206 4.5,31.6 r90 bottom value=27p (schematic designator C52)
"C52_Channel 1" "2700p 50V" CAP_CER_1206 33.3,31.6 r90 bottom value=27p (schematic designator C52)
"C53_Channel 0" "2700p 50V" CAP_CER_1206 4.5,36.8 r90 bottom value=27p (schematic designator C53)
"C53_Channel 1" "2700p 50V" CAP_CER_1206 33.3,36.8 r90 bottom value=27p (schematic designator C53)
"C54_Channel 0" "2700p 50V" CAP_CER_1206 4.5,41.8 r90 bottom value=27p (schematic designator C54)
"C54_Channel 1" "2700p 50V" CAP_CER_1206 33.3,41.8 r90 bottom value=27p (schematic designator C54)
"C55_Channel 0" "2700p 50V" CAP_CER_1206 4.5,46.8 r90 bottom value=27p (schematic designator C55)
"C55_Channel 1" "2700p 50V" CAP_CER_1206 33.3,46.8 r90 bottom value=27p (schematic designator C55)
"C56_Channel 0" "2700p 50V" CAP_CER_1206 4.5,51.8 r90 bottom value=27p (schematic designator C56)
"C56_Channel 1" "2700p 50V" CAP_CER_1206 33.3,51.8 r90 bottom value=27p (schematic designator C56)
"C57_Channel 0" "" CAPC2012(0805)N 5,92.7 r90 bottom value=1.2n (schematic designator C57)
"C57_Channel 1" "" CAPC2012(0805)N 33.4,92.7 r90 bottom value=1.2n (schematic designator C57)
"C58_Channel 0" "" CAPC2012(0805)N 20,92.7 r90 bottom value=1.2n (schematic designator C58)
"C58_Channel 1" "" CAPC2012(0805)N 48.4,92.7 r90 bottom value=1.2n (schematic designator C58)
"C59_Channel 0" "" CAPC2012(0805)N 5,96.5 r90 bottom value=10.8n (schematic designator C59)
"C59_Channel 1" "" CAPC2012(0805)N 33.4,96.5 r90 bottom value=10.8n (schematic designator C59)
"C60_Channel 0" "" CAPC2012(0805)N 20,96.5 r90 bottom value=10.8n (schematic designator C60)
"C60_Channel 1" "" CAPC2012(0805)N 48.4,96.5 r90 bottom value=10.8n (schematic designator C60)
"C61_Channel 0" "" CAPC2012(0805)N 13.5,111.4 r270 bottom value=0.1u (schematic designator C61)
"C61_Channel 1" "" CAPC2012(0805)N 44.4,111.4 r270 bottom value=0.1u (schematic designator C61)
C62 "10u" CAPMP3528X210N 178.8,95 r90 bottom
C63 "0.1u" CAPC2012(0805)N 175.4,95 r90 bottom
C64 "1u" CAPC2012(0805)N 172.4,95 r90 bottom
C65 "" CAPC2012(0805)N 137.2,8 r270 bottom value=filter
C66 "" CAPC2012(0805)N 181.9,15.7 r0 bottom value=filter
C67 "" CAPC2012(0805)N 137,29 r90 bottom value=10n
C68 "" CAPC2012(0805)N 139.2,29 r90 bottom value=10n
C69 "" CAPC2012(0805)N 134.7,29 r270 bottom value=100n
C70 "" CAPC2012(0805)N 115.2,8 r270 bottom value=filter
C71 "" CAPC2012(0805)N 115,29 r90 bottom value=10n
C72 "" CAPC2012(0805)N 117.2,29 r90 bottom value=10n
C73 "" CAPC2012(0805)N 112.7,29 r270 bottom value=100n
C74 "" CAPC2012(0805)N 67.7,8 r270 bottom value=filter
C75 "" CAPC2012(0805)N 67.4,28.9 r90 bottom value=10n
C76 "" CAPC2012(0805)N 69.7,29 r90 bottom value=10n
C77 "" CAPC2012(0805)N 65.2,29 r270 bottom value=100n
C78 "" CAPC2012(0805)N 89.7,8 r270 bottom value=filter
C79 "" CAPC2012(0805)N 89.4,29 r90 bottom value=10n
C80 "" CAPC2012(0805)N 91.7,29 r90 bottom value=10n
C81 "" CAPC2012(0805)N 87.2,29 r270 bottom value=100n
C82 "" CAPC2012(0805)N 162.2,8 r270 bottom value=filter
C83 "" CAPC2012(0805)N 162,28.7 r90 bottom value=10n
C84 "" CAPC2012(0805)N 164.2,28.7 r90 bottom value=10n
C85 "" CAPC2012(0805)N 159.7,28.7 r270 bottom value=100n
"COUTA_Channel 0" "" CAPC2012(0805)N 96.7,104.8 r180 bottom value=6.8p (schematic designator COUTA)
"COUTA_Channel 1" "" CAPC2012(0805)N 76.9,104.8 r180 bottom value=6.8p (schematic designator COUTA)
"COUTB_Channel 0" "" CAPC2012(0805)N 91.5,104.8 r0 bottom value=6.8p (schematic designator COUTB)
"COUTB_Channel 1" "" CAPC2012(0805)N 71.6,104.8 r0 bottom value=6.8p (schematic designator COUTB)
CURSOR "TACT_SMD" TACT_SMD_ON_DIP8_RAISED 113.9,8 r270 top
DA1 "AD9288BSTZ-100" AD9288BSTZ-100_LQFP48 94.1,95.6 r270 bottom
DA2 "AD9288BSTZ-100" AD9288BSTZ-100_LQFP48 73.8,95.6 r270 bottom
"DA3_Channel 0" "AMS1117-ADJ" AMS1117-ADJ_SOT223 22.5,146.5 r90 bottom (schematic designator DA3)
"DA3_Channel 1" "AMS1117-ADJ" AMS1117-ADJ_SOT223 52,146.5 r90 bottom (schematic designator DA3)
"DIFF_Channel 0" "AD8138ARZ" AD8138ARZ_SOIC8 13.5,117.7 r0 bottom (schematic designator DIFF)
"DIFF_Channel 1" "AD8138ARZ" AD8138ARZ_SOIC8 44.4,117.7 r0 bottom (schematic designator DIFF)
EN_CH0 "TACT_SMD" TACT_SMD_ON_DIP8_RAISED 66.4,8 r270 top
EN_CH1 "TACT_SMD" TACT_SMD_ON_DIP8_RAISED 88.5,8 r270 top
FUNC "EC11E" EC11E_ENCODER_SW 160.9,25.5 r0 top
"K1_Channel 0" "HFD4_3-S" HFD4_3_S_SMT 13.7,65.7 r270 bottom (schematic designator K1)
"K1_Channel 1" "HFD4_3-S" HFD4_3_S_SMT 42.2,65.7 r270 bottom (schematic designator K1)
"K2_Channel 0" "HFD4_3-S" HFD4_3_S_SMT 13.7,79.5 r270 bottom (schematic designator K2)
"K2_Channel 1" "HFD4_3-S" HFD4_3_S_SMT 42.5,79.5 r270 bottom (schematic designator K2)
"K3_Channel 0" "HFD4_3-S" HFD4_3_S_SMT 13.7,93.2 r270 bottom (schematic designator K3)
"K3_Channel 1" "HFD4_3-S" HFD4_3_S_SMT 42.5,93.3 r270 bottom (schematic designator K3)
LED_RUN "#NAME?" LED_3MM_GREEN 183,29.5 r180 top
MENU_BACK "TACT_SMD" TACT_SMD_ON_DIP8_RAISED 161,8 r270 top
P1 "P_HEADER_1x5" P_HEADER_1x5_2.54_ANGLE 183,63.6 r90 top
R1 "47" RESC2012(0805)N 104.5,89.5 r90 bottom
R2 "47" RESC2012(0805)N 106.9,89.5 r90 bottom
"R3_Channel 0" "1k" RESC2012(0805)N 14.5,146.3 r180 top (schematic designator R3)
"R3_Channel 1" "1k" RESC2012(0805)N 31.8,146.3 r180 top (schematic designator R3)
"R4_Channel 0" "47k" RESC2012(0805)N 14.5,148.5 r0 top (schematic designator R4)
"R4_Channel 1" "47k" RESC2012(0805)N 31.8,148.5 r0 top (schematic designator R4)
"R5_Channel 0" "121" RESC2012(0805)N 22.5,144 r0 top (schematic designator R5)
"R5_Channel 1" "121" RESC2012(0805)N 52,144 r0 top (schematic designator R5)
"R6_Channel 0" "169" RESC2012(0805)N 22.5,141.5 r0 top (schematic designator R6)
"R6_Channel 1" "169" RESC2012(0805)N 52,141.5 r0 top (schematic designator R6)
"R7_Channel 0" "200k" R_1206 22.5,31.8 r90 bottom (schematic designator R7)
"R7_Channel 1" "200k" R_1206 51.3,31.9 r90 bottom (schematic designator R7)
"R8_Channel 0" "200k" R_1206 22.4,36.9 r90 bottom (schematic designator R8)
"R8_Channel 1" "200k" R_1206 51.2,37 r90 bottom (schematic designator R8)
"R9_Channel 0" "200k" R_1206 22.4,41.9 r90 bottom (schematic designator R9)
"R9_Channel 1" "200k" R_1206 51.2,41.9 r90 bottom (schematic designator R9)
"R10_Channel 0" "200k" R_1206 22.4,47 r90 bottom (schematic designator R10)
"R10_Channel 1" "200k" R_1206 51.2,47.1 r90 bottom (schematic designator R10)
"R11_Channel 0" "200k" R_1206 22.5,51.9 r90 bottom (schematic designator R11)
"R11_Channel 1" "200k" R_1206 51.3,51.9 r90 bottom (schematic designator R11)
"R12_Channel 0" "950k" RESC2012(0805)N 7.5,65.2 r270 bottom (schematic designator R12)
"R12_Channel 1" "950k" RESC2012(0805)N 35.9,65.2 r270 bottom (schematic designator R12)
"R13_Channel 0" "950k" RESC2012(0805)N 22.5,65.2 r270 bottom (schematic designator R13)
"R13_Channel 1" "950k" RESC2012(0805)N 50.9,65.2 r270 bottom (schematic designator R13)
"R14_Channel 0" "47k" RESC2012(0805)N 7.5,79 r270 bottom (schematic designator R14)
"R14_Channel 1" "47k" RESC2012(0805)N 36.2,79 r270 bottom (schematic designator R14)
"R15_Channel 0" "47k" RESC2012(0805)N 22.5,79 r270 bottom (schematic designator R15)
"R15_Channel 1" "47k" RESC2012(0805)N 50.9,79 r270 bottom (schematic designator R15)
"R16_Channel 0" "1k" RESC2012(0805)N 10.4,146.3 r180 top (schematic designator R16)
"R16_Channel 1" "1k" RESC2012(0805)N 35.9,146.3 r180 top (schematic designator R16)
"R17_Channel 0" "4.5k" RESC2012(0805)N 7.5,92.7 r270 bottom (schematic designator R17)
"R17_Channel 1" "4.5k" RESC2012(0805)N 35.9,92.7 r270 bottom (schematic designator R17)
"R18_Channel 0" "4.5k" RESC2012(0805)N 22.5,92.7 r270 bottom (schematic designator R18)
"R18_Channel 1" "4.5k" RESC2012(0805)N 50.9,92.7 r270 bottom (schematic designator R18)
"R19_Channel 0" "47k" RESC2012(0805)N 10.5,148.5 r0 top (schematic designator R19)
"R19_Channel 1" "47k" RESC2012(0805)N 35.9,148.5 r0 top (schematic designator R19)
"R20_Channel 0" "500" RESC2012(0805)N 7.5,96.5 r270 bottom (schematic designator R20)
"R20_Channel 1" "500" RESC2012(0805)N 35.9,96.5 r270 bottom (schematic designator R20)
"R21_Channel 0" "500" RESC2012(0805)N 22.5,96.5 r270 bottom (schematic designator R21)
"R21_Channel 1" "500" RESC2012(0805)N 50.9,96.5 r270 bottom (schematic designator R21)
"R22_Channel 0" "200k" R_1206 7.2,31.6 r90 bottom (schematic designator R22)
"R22_Channel 1" "200k" R_1206 36,31.6 r90 bottom (schematic designator R22)
"R23_Channel 0" "200k" R_1206 7.3,36.8 r90 bottom (schematic designator R23)
"R23_Channel 1" "200k" R_1206 36.1,36.9 r90 bottom (schematic designator R23)
"R24_Channel 0" "200k" R_1206 7.3,41.9 r90 bottom (schematic designator R24)
"R24_Channel 1" "200k" R_1206 36.1,41.9 r90 bottom (schematic designator R24)
"R25_Channel 0" "200k" R_1206 7.3,46.9 r90 bottom (schematic designator R25)
"R25_Channel 1" "200k" R_1206 36.1,46.9 r90 bottom (schematic designator R25)
"R26_Channel 0" "200k" R_1206 7.2,51.9 r90 bottom (schematic designator R26)
"R26_Channel 1" "200k" R_1206 36,51.9 r90 bottom (schematic designator R26)
"R27_Channel 0" "1k" RESC2012(0805)N 6.4,146.3 r180 top (schematic designator R27)
"R27_Channel 1" "1k" RESC2012(0805)N 39.9,146.3 r180 top (schematic designator R27)
"R28_Channel 0" "47k" RESC2012(0805)N 6.5,148.5 r0 top (schematic designator R28)
"R28_Channel 1" "47k" RESC2012(0805)N 39.9,148.5 r0 top (schematic designator R28)
"R29_Channel 0" "3.9k" RESC2012(0805)N 13.6,123.1 r180 top (schematic designator R29)
"R29_Channel 1" "3.9k" RESC2012(0805)N 44.4,123.1 r180 top (schematic designator R29)
"R30_Channel 0" "10k" RESC2012(0805)N 13.6,125.1 r180 top (schematic designator R30)
"R30_Channel 1" "10k" RESC2012(0805)N 44.4,125 r180 top (schematic designator R30)
R31 "560" RESC2012(0805)N 181.8,25.9 r180 bottom
R32 "100k" RESC2012(0805)N 179,63.7 r180 bottom
R33 "100k" RESC2012(0805)N 175,63.7 r180 bottom
R34 "10k" RESC2012(0805)N 142.4,12.7 r90 top
R35 "10k" RESC2012(0805)N 177.2,21 r180 top
R36 "3.3k" RESC2012(0805)N 133.4,15 r270 top
R37 "3.3k" RESC2012(0805)N 132.4,29 r270 bottom
R38 "3.3k" RESC2012(0805)N 138.4,15 r270 top
R39 "10k" RESC2012(0805)N 120.5,12.7 r90 top
R40 "3.3k" RESC2012(0805)N 111.5,15 r270 top
R41 "3.3k" RESC2012(0805)N 110.4,29 r270 bottom
R42 "3.3k" RESC2012(0805)N 116.5,15 r270 top
R43 "10k" RESC2012(0805)N 72.9,12.7 r90 top
R44 "3.3k" RESC2012(0805)N 63.9,15 r270 top
R45 "3.3k" RESC2012(0805)N 62.9,29 r270 bottom
R46 "3.3k" RESC2012(0805)N 68.9,15 r270 top
R47 "10k" RESC2012(0805)N 95.2,12.7 r90 top
R48 "3.3k" RESC2012(0805)N 86,15 r270 top
R49 "3.3k" RESC2012(0805)N 85,29 r270 bottom
R50 "3.3k" RESC2012(0805)N 91,15 r270 top
R51 "10k" RESC2012(0805)N 167.5,13 r90 top
R52 "3.3k" RESC2012(0805)N 158.5,15 r270 top
R53 "3.3k" RESC2012(0805)N 157.4,28.7 r270 bottom
R54 "3.3k" RESC2012(0805)N 163.5,15 r270 top
R55 "100k" RESC2012(0805)N 183.9,92.5 r270 bottom
"RF+_Channel 0" "499" RESC2012(0805)N 18.8,117.7 r90 bottom (schematic designator RF+)
"RF+_Channel 1" "499" RESC2012(0805)N 49.4,117.7 r90 bottom (schematic designator RF+)
"RF-_Channel 0" "499" RESC2012(0805)N 8.5,117.7 r90 bottom (schematic designator RF-)
"RF-_Channel 1" "499" RESC2012(0805)N 39.4,117.7 r90 bottom (schematic designator RF-)
"RG+_Channel 0" "499" RESC2012(0805)N 16.2,112.7 r90 bottom (schematic designator RG+)
"RG+_Channel 1" "499" RESC2012(0805)N 47,112.7 r90 bottom (schematic designator RG+)
"RG-_Channel 0" "499" RESC2012(0805)N 10.7,112.7 r90 bottom (schematic designator RG-)
"RG-_Channel 1" "499" RESC2012(0805)N 41.8,112.7 r90 bottom (schematic designator RG-)
"ROUTA+_Channel 0" "50" RESC2012(0805)N 10.6,123.4 r90 bottom (schematic designator ROUTA+)
"ROUTA+_Channel 1" "50" RESC2012(0805)N 41.6,123.4 r90 bottom (schematic designator ROUTA+)
"ROUTA-_Channel 0" "50" RESC2012(0805)N 12.9,123.4 r90 bottom (schematic designator ROUTA-)
"ROUTA-_Channel 1" "50" RESC2012(0805)N 43.7,123.4 r90 bottom (schematic designator ROUTA-)
"ROUTB+_Channel 0" "50" RESC2012(0805)N 17.3,123.4 r90 bottom (schematic designator ROUTB+)
"ROUTB+_Channel 1" "50" RESC2012(0805)N 47.9,123.4 r90 bottom (schematic designator ROUTB+)
"ROUTB-_Channel 0" "50" RESC2012(0805)N 15.1,123.4 r90 bottom (schematic designator ROUTB-)
"ROUTB-_Channel 1" "50" RESC2012(0805)N 45.8,123.4 r90 bottom (schematic designator ROUTB-)
RUN_STOP "TACT_SMD" TACT_SMD_ON_DIP8_RAISED 181.9,14.5 r0 top
SET_CH0 "EC11E" EC11E_ENCODER_SW 66.4,25.5 r0 top
SET_CH1 "EC11E" EC11E_ENCODER_SW 88.4,25.5 r0 top
STM32F103RCT6 "STM32F103RCT6" STM32F103RCT6_MODULE_PBD_2X14 81,55 r0 top
SW_POWER "MSK12C02" MSK12C02 188.2,94.3 r90 bottom
TIME "EC11E" EC11E_ENCODER_SW 113.9,25.5 r0 top
TRG "EC11E" EC11E_ENCODER_SW 135.9,25.5 r0 top
TRG_MODE "TACT_SMD" TACT_SMD_ON_DIP8_RAISED 135.9,8 r270 top
U1 "A0503S-2WR3" A0503S-2WR3_SIP5 126.7,75.6 r0 top
USB-HUB "USB-HUB" MINGWU_29P3X18P9_MECH 118,55 r180 top
"VD1_Channel 0" "PS76SB10" SOD323 13.7,69.5 r180 top (schematic designator VD1)
"VD1_Channel 1" "PS76SB10" SOD323 42.2,69.5 r180 top (schematic designator VD1)
"VD2_Channel 0" "BAV99" BAV99_SOT23 18.5,56 r90 bottom (schematic designator VD2)
"VD2_Channel 1" "BAV99" BAV99_SOT23 46.9,56 r90 bottom (schematic designator VD2)
"VD3_Channel 0" "PS76SB10" SOD323 13.7,83.2 r180 top (schematic designator VD3)
"VD3_Channel 1" "PS76SB10" SOD323 42.4,83.2 r180 top (schematic designator VD3)
"VD4_Channel 0" "BAV99" BAV99_SOT23 8.7,55.9 r270 bottom (schematic designator VD4)
"VD4_Channel 1" "BAV99" BAV99_SOT23 37.2,55.9 r270 bottom (schematic designator VD4)
"VD5_Channel 0" "PS76SB10" SOD323 13.7,97 r180 top (schematic designator VD5)
"VD5_Channel 1" "PS76SB10" SOD323 42.4,97.1 r180 top (schematic designator VD5)
"VT1_Channel 0" "BC847" SOT23-3N 14.2,147.5 r270 bottom (schematic designator VT1)
"VT1_Channel 1" "BC847" SOT23-3N 31.7,147.5 r270 bottom (schematic designator VT1)
"VT2_Channel 0" "BC847" SOT23-3N 10.2,147.5 r270 bottom (schematic designator VT2)
"VT2_Channel 1" "BC847" SOT23-3N 35.7,147.5 r270 bottom (schematic designator VT2)
"VT3_Channel 0" "BC847" SOT23-3N 6.2,147.5 r270 bottom (schematic designator VT3)
"VT3_Channel 1" "BC847" SOT23-3N 39.7,147.5 r270 bottom (schematic designator VT3)
VT4 "AO3401" SOT23-3N 182.9,97 r90 bottom
XS1 "PBD_2X20_2P54" PBD_2X20_2P54_THT 83.8,84.5 r180 top
Z1 "ACH3218-223-TD01" ACH3218_3TERM_FILTER 112.9,78.3 r180 bottom
ZL1 "120R" INDC1608(0603)N 94.1,99.8 r270 top
ZL2 "120R" INDC1608(0603)N 73.8,99.8 r270 top

## Footprints (in the part's own frame and the unit in brackets; to place one, negate y for a bottom-side part, rotate by r counter-clockwise, add the part's x,y. Pads: shape width x height; smd on the part's side, far side on the other; paste and mask are expansions set on the pad)
A0503S-2WR3_SIP5 [mm] "YLPTEC A0503S-2WR3, SIP 19.5x7.0 mm"
  rect 1.6x1.6 hole 0.9: 1(-6.35,0)
  round 1.6 hole 0.9: 2(-3.81,0) 4(1.27,0) 5(3.81,0) 6(6.35,0)
  silkscreen extent -9.75,-6.25 9.75,1, body extent -9.75,-6 9.75,1, height 10
ACH3218_3TERM_FILTER [mm] "TDK ACH3218 vertical SMD 3-terminal filter"
  rect 1.4x1.94 smd: 1(-1.8,0) 3(1.8,0)
  rect 0.6x1.94 smd: 2(0,0)
  silkscreen extent -0.9,-1.15 0.9,1.15, body extent -1.6,-0.9 1.6,0.9, height 2.5
AD8138ARZ_SOIC8 [mm] "ADI R-8 SOIC_N, 1.27 mm pitch"
  rect 1.5x0.6 smd: 1(-2.65,1.905) 2(-2.65,0.635) 3(-2.65,-0.635) 4(-2.65,-1.905) 5(2.65,-1.905) 6(2.65,-0.635) 7(2.65,0.635) 8(2.65,1.905)
  silkscreen extent -3.55,-2.4 1.75,2.55, body extent -1.95,-2.45 1.95,2.45, height 1.75
AD9288BSTZ-100_LQFP48 [mm] "ADI ST-48, LQFP-48 7x7 mm, 0.5 mm pitch"
  rect 1.5x0.3 smd mask+0.025: 1(-4.3,-2.75) 2(-4.3,-2.25) 3(-4.3,-1.75) 4(-4.3,-1.25) 5(-4.3,-0.75) 6(-4.3,-0.25) 7(-4.3,0.25) 8(-4.3,0.75) 9(-4.3,1.25) 10(-4.3,1.75) 11(-4.3,2.25) 12(-4.3,2.75) 25(4.3,2.75) 26(4.3,2.25) 27(4.3,1.75) 28(4.3,1.25) 29(4.3,0.75) 30(4.3,0.25) 31(4.3,-0.25) 32(4.3,-0.75) 33(4.3,-1.25) 34(4.3,-1.75) 35(4.3,-2.25) 36(4.3,-2.75)
  rect 0.3x1.5 smd mask+0.025: 13(-2.75,4.3) 14(-2.25,4.3) 15(-1.75,4.3) 16(-1.25,4.3) 17(-0.75,4.3) 18(-0.25,4.3) 19(0.25,4.3) 20(0.75,4.3) 21(1.25,4.3) 22(1.75,4.3) 23(2.25,4.3) 24(2.75,4.3) 37(2.75,-4.3) 38(2.25,-4.3) 39(1.75,-4.3) 40(1.25,-4.3) 41(0.75,-4.3) 42(0.25,-4.3) 43(-0.25,-4.3) 44(-0.75,-4.3) 45(-1.25,-4.3) 46(-1.75,-4.3) 47(-2.25,-4.3) 48(-2.75,-4.3)
  silkscreen extent -5.1,-3.45 3.45,3.45, body extent -3.5,-3.5 3.5,3.5, height 1.6
ADA4817-1ARDZ_SOIC8_EP [mm] "ADI RD-8-4 SOIC_N_EP, 1.27 mm pitch"
  rect 1.5x0.6 smd: 1(-2.65,1.905) 2(-2.65,0.635) 3(-2.65,-0.635) 4(-2.65,-1.905) 5(2.65,-1.905) 6(2.65,-0.635) 7(2.65,0.635) 8(2.65,1.905)
  rect 2.3x2.3 smd: 9(0,0)
  silkscreen extent -3.55,-2.4 1.75,2.6, body extent -1.95,-2.45 1.95,2.45, height 1.7
AMS1117-ADJ_SOT223 [mm] "AMS SOT-223, 2.29 mm lead pitch, tab is VOUT"
  rect 1.3x2 smd: 1(-2.29,3.25) 2(0,3.25) 3(2.29,3.25)
  rect 3.6x2 smd: 2(0,-3.25)
  silkscreen extent -3.65,-1.85 3.35,2.15, body extent -3.25,-4 3.25,4, height 1.8
BAV99_SOT23 [mm] "Nexperia BAV99 SOT23/TO-236AB"
  rect 0.7x1 smd: 1(-0.95,-1.15) 2(0.95,-1.15) 3(0,1.15)
  silkscreen extent -1.45,-0.42 1.45,0.45, body extent -1.45,-0.65 1.45,0.65, height 1.1
BNC_VERTICAL_THT_5PIN [mm] "Generic vertical BNC THT, 4 shell legs"
  round 2 hole 1.2: 1(0,0)
  round 2.8 hole 1.6: 2(-3.43,3.43) 3(3.43,3.43) 4(3.43,-3.43) 5(-3.43,-3.43)
  silkscreen extent -2.5,-2.5 2.5,2.9, body extent -5.5,-5.5 5.5,5.5, height 20.6
CAP_CER_1206 [mm] "Chip Capacitor 1206 2-Leads"
  rect 1.2x1.9 smd: 1(-1.55,0) 2(1.55,0)
  silkscreen extent -0.64,-0.97 0.64,0.95, body extent -1.6,-0.83 1.6,0.82, height 1.6
CAPC2012(0805)N [mm] "Chip Capacitor, Body 2.0x1.3mm, IPC Medium Density"
  rect 1.3x1.5 smd: 1(-0.85,0) 2(0.85,0)
  silkscreen extent -0.09,-1.02 0.09,1.02, body extent -1.02,-0.64 0.98,0.62, height 0.78
CAPMP3528X210N [mm] "Molded body capacitor, Body 3.5x2.8mm, 1210, IPC Nominal settings"
  round 0.254 on Mech15: 0(0,0)
  rrect25% 1.8x2.3 smd: 1(-1.45,0) 2(1.45,0)
  Top Layer pour cut-out: -0.508,1.27 0.508,1.27 0.508,-1.27 -0.508,-1.27
  silkscreen extent -1.5,-1.8 1.1,1.8, body extent -1.75,-1.4 1.75,1.4, height 2.1
CAPMP7343X310N [mm] "Molded body capacitor, Body 7.3x4.3mm, 2917, IPC Nominal settings"
  round 1 on Mech15: 0(0,0)
  rrect20% 2.55x2.45 smd: 1(-3.025,0) 2(3.025,0)
  silkscreen extent -3.3,-2.3 3.7,2.3, body extent -3.8,-1.97 3.8,1.98, height 3.1
EC11E_ENCODER_SW [mm] "Alps Alpine EC11E vertical encoder with push switch"
  round 1.8 hole 1: A(-2.5,-7.5) B(2.5,-7.5) C(0,-7.5) D(-2.5,7) E(2.5,7)
  rect 2.5x3.6 hole 1.5 slot 2.6 at 90 deg: ""(-6.25,0) ""(6.25,0)
  silkscreen extent -5.85,-6 5.85,6, body extent -5.85,-6 5.85,6, height 13.5
HFD4_3_S_SMT [mm] "Hongfa HFD4/3-S, standard SMT leads (not S1 or S3)"
  rect 0.8x2.15 smd: 1(-3.8,3.175) 2(-0.6,3.175) 3(1.6,3.175) 4(3.8,3.175) 5(3.8,-3.175) 6(1.6,-3.175) 7(-0.6,-3.175) 8(-3.8,-3.175)
  silkscreen extent -5.5,-2.7 5.1,4.2, body extent -5,-3.25 5,3.25, height 5.65
INDC1608(0603)N [mm] "Chip Inductor, Body 1.6x0.8mm, IPC Medium Density"
  rect 1x1 smd: 1(-0.8,0) 2(0.8,0)
  body extent -0.8,-0.4 0.8,0.4, height 0.45
LED_3MM_GREEN [mm]
  rect 1.7x1.7 hole 0.7: 1(0,0)
  round 1.7 hole 0.7: 2(2.54,0)
  silkscreen extent -0.12,-1.8 2.67,1.8, body extent -0.39,-1.65 2.91,1.65, height 5.51
MINGWU_29P3X18P9_MECH [mm] "Mingwudianzi 29.3x18.9 mm board, 3 mounting holes, 6 mm standoffs"
  round 2.5 hole 2.5 unplated: ""(-12.45,9.45) ""(-12.45,-9.45) ""(13.1,0)
  silkscreen extent -14.65,-9.8 14.65,9.45, body extent -15.25,-11.65 15.25,11.65, height 10.9
MSK12C02 [mm] "Shou Han MSK12C02, SPDT slide switch, SMD, 8.0 x 2.8 x 1.4 mm, 3 signal + 4 shell tabs"
  rect 0.6x1.45 smd: 1(-2.4,-2.125) 2(-0.9,-2.125) 3(2.1,-2.125)
  rect 1x0.7 smd: 4(-3.7,-1.15) 4(-3.7,1.15) 4(3.7,-1.15) 4(3.7,1.15)
  round 0.85 hole 0.85 unplated: ""(-1.5,0) ""(1.5,0)
  silkscreen extent -3.35,-3.26 3.35,1.4, body extent -4.2,-2.85 4.2,2.78, height 1.4
P_HEADER_1x5_2.54_ANGLE [mm] "Connector; Header; 6 Position, Male, Angle"
  rect 1.5x1.5 hole 0.9: 1(-5.08,0)
  round 1.5 hole 0.9: 2(-2.54,0) 3(0,0) 4(2.54,0) 5(5.08,0)
  silkscreen extent -6.35,-1.27 6.35,1.27, body extent -6.35,-0.32 6.35,10.04, height 2.57
PBD_2X20_2P54_THT [mm] "2x20 vertical female socket, 2.54 mm pitch, 8.5 mm body"
  rect 1.7x1.7 hole 1.02: 1(-24.13,-1.27)
  round 1.7 hole 1.02: 2(-24.13,1.27) 3(-21.59,-1.27) 4(-21.59,1.27) 5(-19.05,-1.27) 6(-19.05,1.27) 7(-16.51,-1.27) 8(-16.51,1.27) 9(-13.97,-1.27) 10(-13.97,1.27) 11(-11.43,-1.27) 12(-11.43,1.27) 13(-8.89,-1.27) 14(-8.89,1.27) 15(-6.35,-1.27) 16(-6.35,1.27) 17(-3.81,-1.27) 18(-3.81,1.27) 19(-1.27,-1.27) 20(-1.27,1.27) 21(1.27,-1.27) 22(1.27,1.27) 23(3.81,-1.27) 24(3.81,1.27) 25(6.35,-1.27) 26(6.35,1.27) 27(8.89,-1.27) 28(8.89,1.27) 29(11.43,-1.27) 30(11.43,1.27) 31(13.97,-1.27) 32(13.97,1.27) 33(16.51,-1.27) 34(16.51,1.27) 35(19.05,-1.27) 36(19.05,1.27) 37(21.59,-1.27) 38(21.59,1.27) 39(24.13,-1.27) 40(24.13,1.27)
  silkscreen extent -26,-2.85 25.7,2.55, body extent -25.65,-2.5 25.65,2.5, height 8.5
R_1206 [mm] "Generic 3216/1206 SMD resistor"
  rect 1.05x1.8 smd: 1(-1.275,0) 2(1.275,0)
  silkscreen extent -2.05,-1.08 0.56,1.25, body extent -1.6,-0.8 1.6,0.8, height 0.6
RESC2012(0805)N [mm] "Chip Resistor, Body 2.0x1.3mm, IPC Medium Density"
  rect 1.2x1.4 smd: 1(-0.9,0) 2(0.9,0)
  body extent -1,-0.62 1,0.64, height 0.78
SOD323 [mm] "SOD-323; 2 Leads; Body 1.8 x 1.35 mm, (LxW)"
  round 0.508 on Mech15: 0(0,0)
  rrect25% 0.6x0.7 smd: 1(-1.25,0) 2(1.25,0)
  silkscreen extent -1.2,-0.9 0.64,0.75, body extent -1.3,-0.68 1.3,0.68, height 1.1
SOT23-3N [mm] "SOT23, 3-Leads, Body 2.9x1.3mm, Pitch 0.95mm, Lead Span 2.5mm, IPC Medium Density"
  rect 1.5x0.6 smd: 1(-0.95,0.95) 2(-0.95,-0.95) 3(0.95,0)
  silkscreen extent 0.2,-1.5 0.7,1.5, body extent -1.57,-1.5 1.57,1.5, height 1
STM32F103RCT6_MODULE_PBD_2X14 [mm] "STM32F103RCT6 module on two 2x14 PBD sockets, 35.56x27.94 mm board"
  rect 1.7x1.7 hole 1.02: 1(-16.51,10.16) 29(-16.51,-12.7)
  round 1.7 hole 1.02: 2(-16.51,12.7) 3(-13.97,10.16) 4(-13.97,12.7) 5(-11.43,10.16) 6(-11.43,12.7) 7(-8.89,10.16) 8(-8.89,12.7) 9(-6.35,10.16) 10(-6.35,12.7) 11(-3.81,10.16) 12(-3.81,12.7) 13(-1.27,10.16) 14(-1.27,12.7) 15(1.27,10.16) 16(1.27,12.7) 17(3.81,10.16) 18(3.81,12.7) 19(6.35,10.16) 20(6.35,12.7) 21(8.89,10.16) 22(8.89,12.7) 23(11.43,10.16) 24(11.43,12.7) 25(13.97,10.16) 26(13.97,12.7) 27(16.51,10.16) 28(16.51,12.7) 30(-16.51,-10.16) 31(-13.97,-12.7) 32(-13.97,-10.16) 33(-11.43,-12.7) 34(-11.43,-10.16) 35(-8.89,-12.7) 36(-8.89,-10.16) 37(-6.35,-12.7) 38(-6.35,-10.16) 39(-3.81,-12.7) 40(-3.81,-10.16) 41(-1.27,-12.7) 42(-1.27,-10.16) 43(1.27,-12.7) 44(1.27,-10.16) 45(3.81,-12.7) 46(3.81,-10.16) 47(6.35,-12.7) 48(6.35,-10.16) 49(8.89,-12.7) 50(8.89,-10.16) 51(11.43,-12.7) 52(11.43,-10.16) 53(13.97,-12.7) 54(13.97,-10.16) 55(16.51,-12.7) 56(16.51,-10.16)
  silkscreen extent -17.6,-13.98 17.6,13.98, body extent -17.78,-13.97 19,13.97, height 16.14
TACT_SMD_ON_DIP8_RAISED [mm] "Raised tactile switch on DIP-8 7.62 mm carrier"
  rect 1.7x1.7 hole 0.9: 1(-3.81,3.81)
  round 1.7 hole 0.9: 2(-3.81,1.27) 3(-3.81,-1.27) 4(-3.81,-3.81) 5(3.81,-3.81) 6(3.81,-1.27) 7(3.81,1.27) 8(3.81,3.81)
  silkscreen extent -5.1,-5.1 4.8,5.1, body extent -4.8,-5.1 4.8,5.1, height 7.5